# Altium PCB Bite_Force_System_PCB.PcbDoc
Units mm, origin at the board's own origin, x right, y up, seen from the top; angles counter-clockwise.
Board outline 67 x 53 mm, 4 copper layers (L1 [Signal], L2 [GND], L3 [GND], L4 [Signal]), stack 1.57 mm thick; 50 components, 29 nets, 301 pads, 46 vias.
Unrouted connection lines stored in the file: 20.
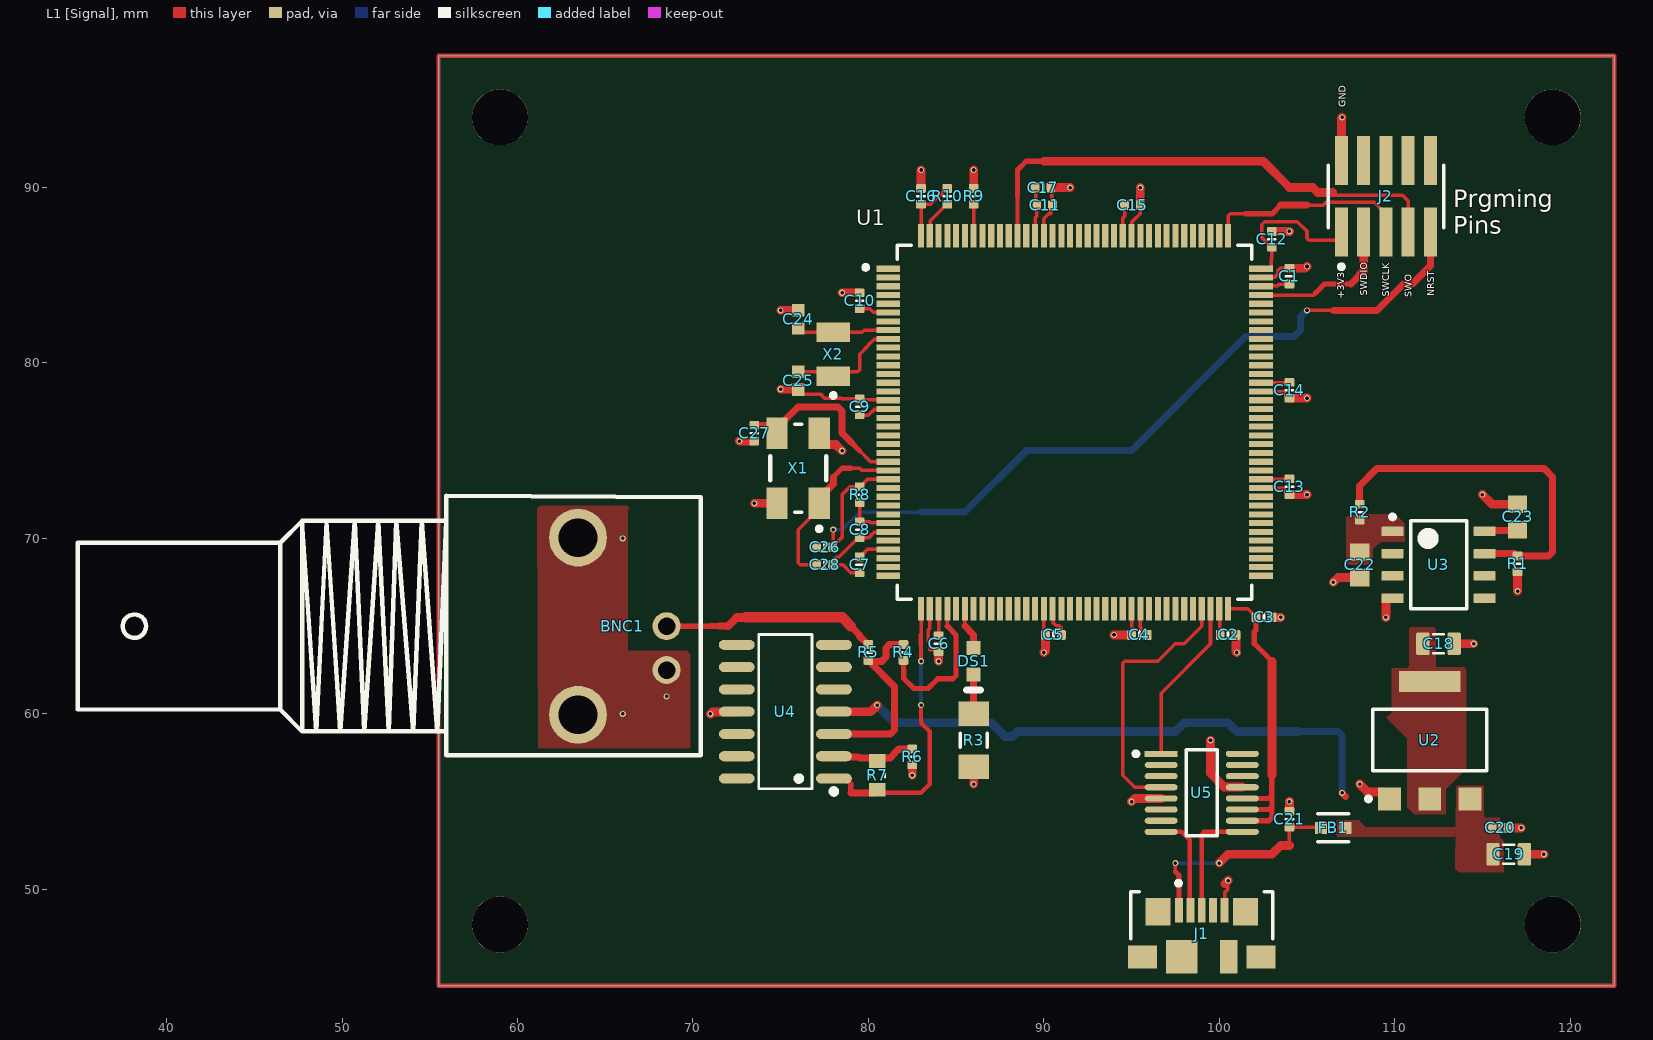
[diagram p0: L1 [Signal] view]
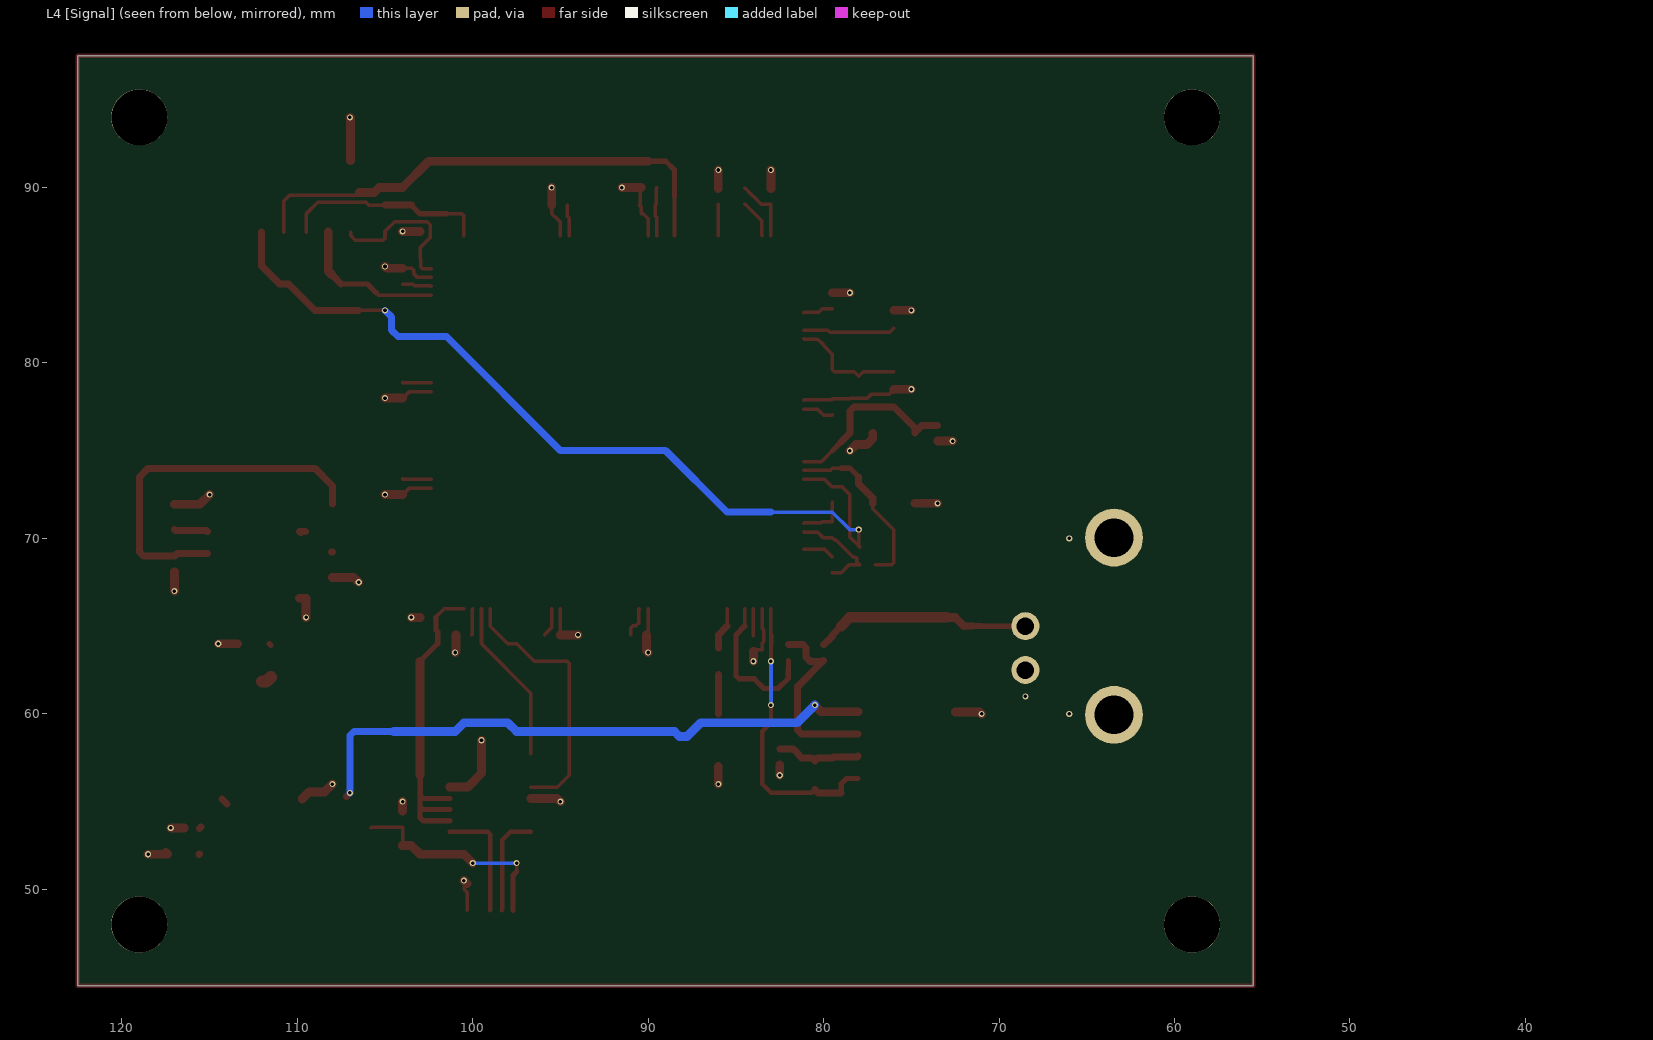
[diagram p1: L4 [Signal] view, seen from below]
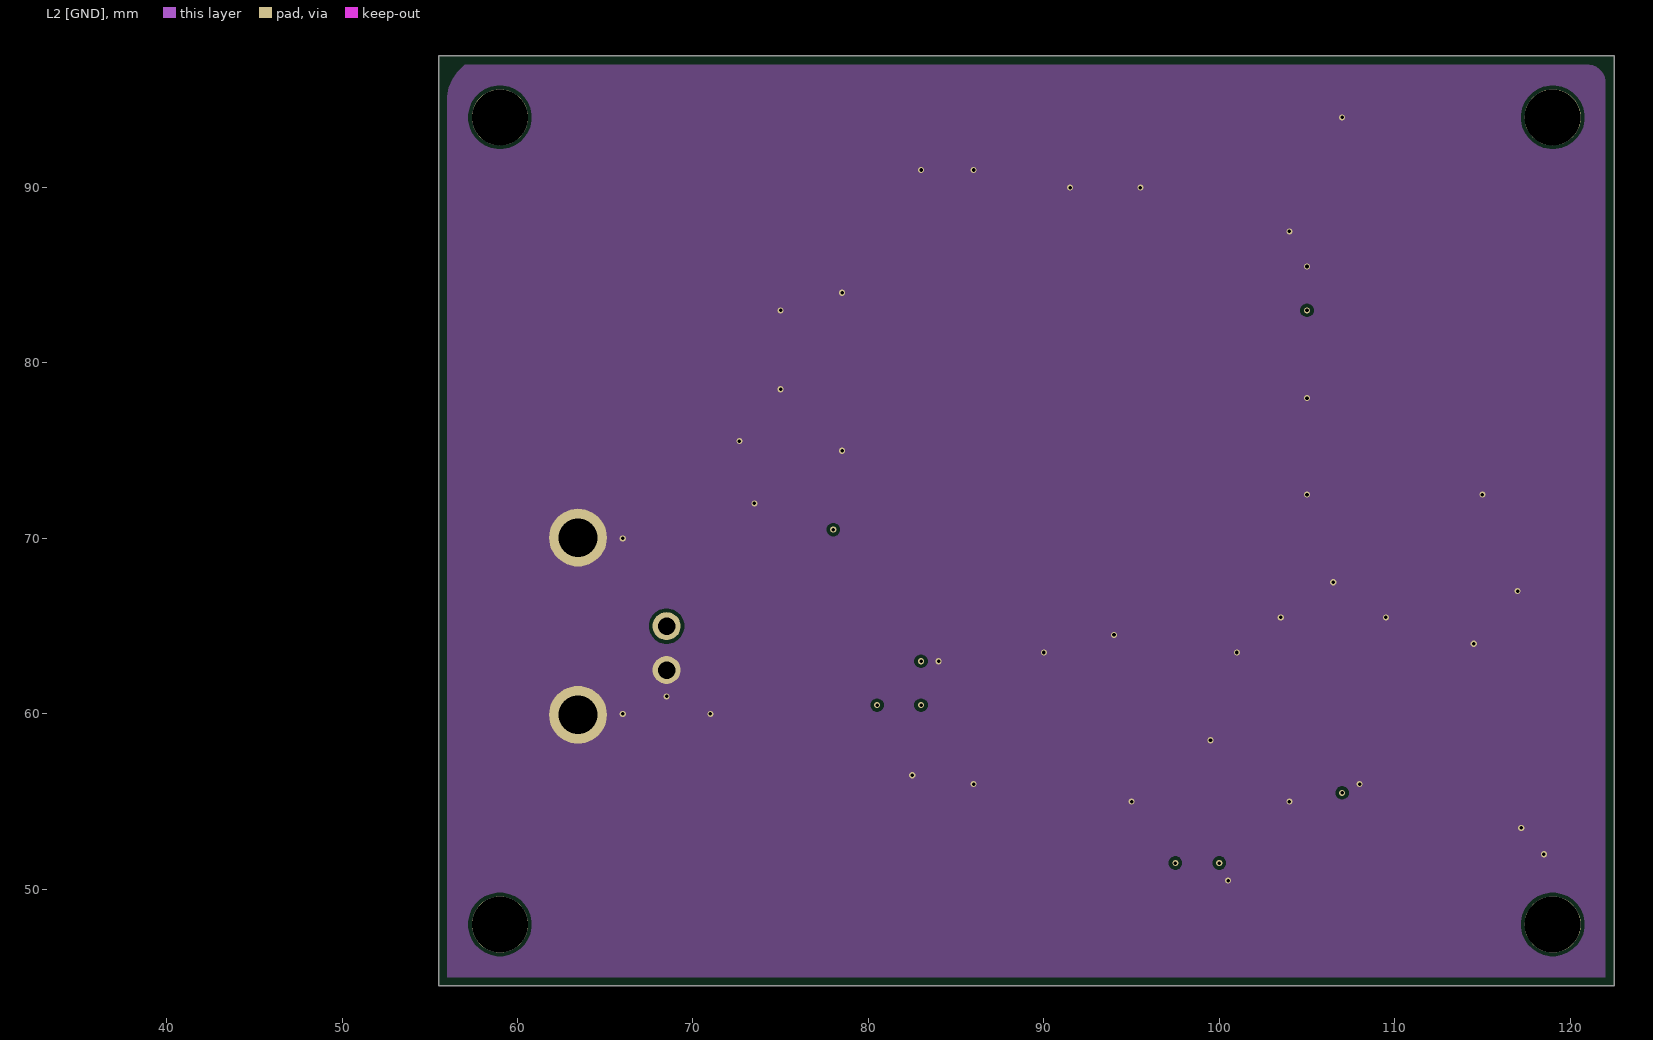
[diagram p2: L2 [GND]]
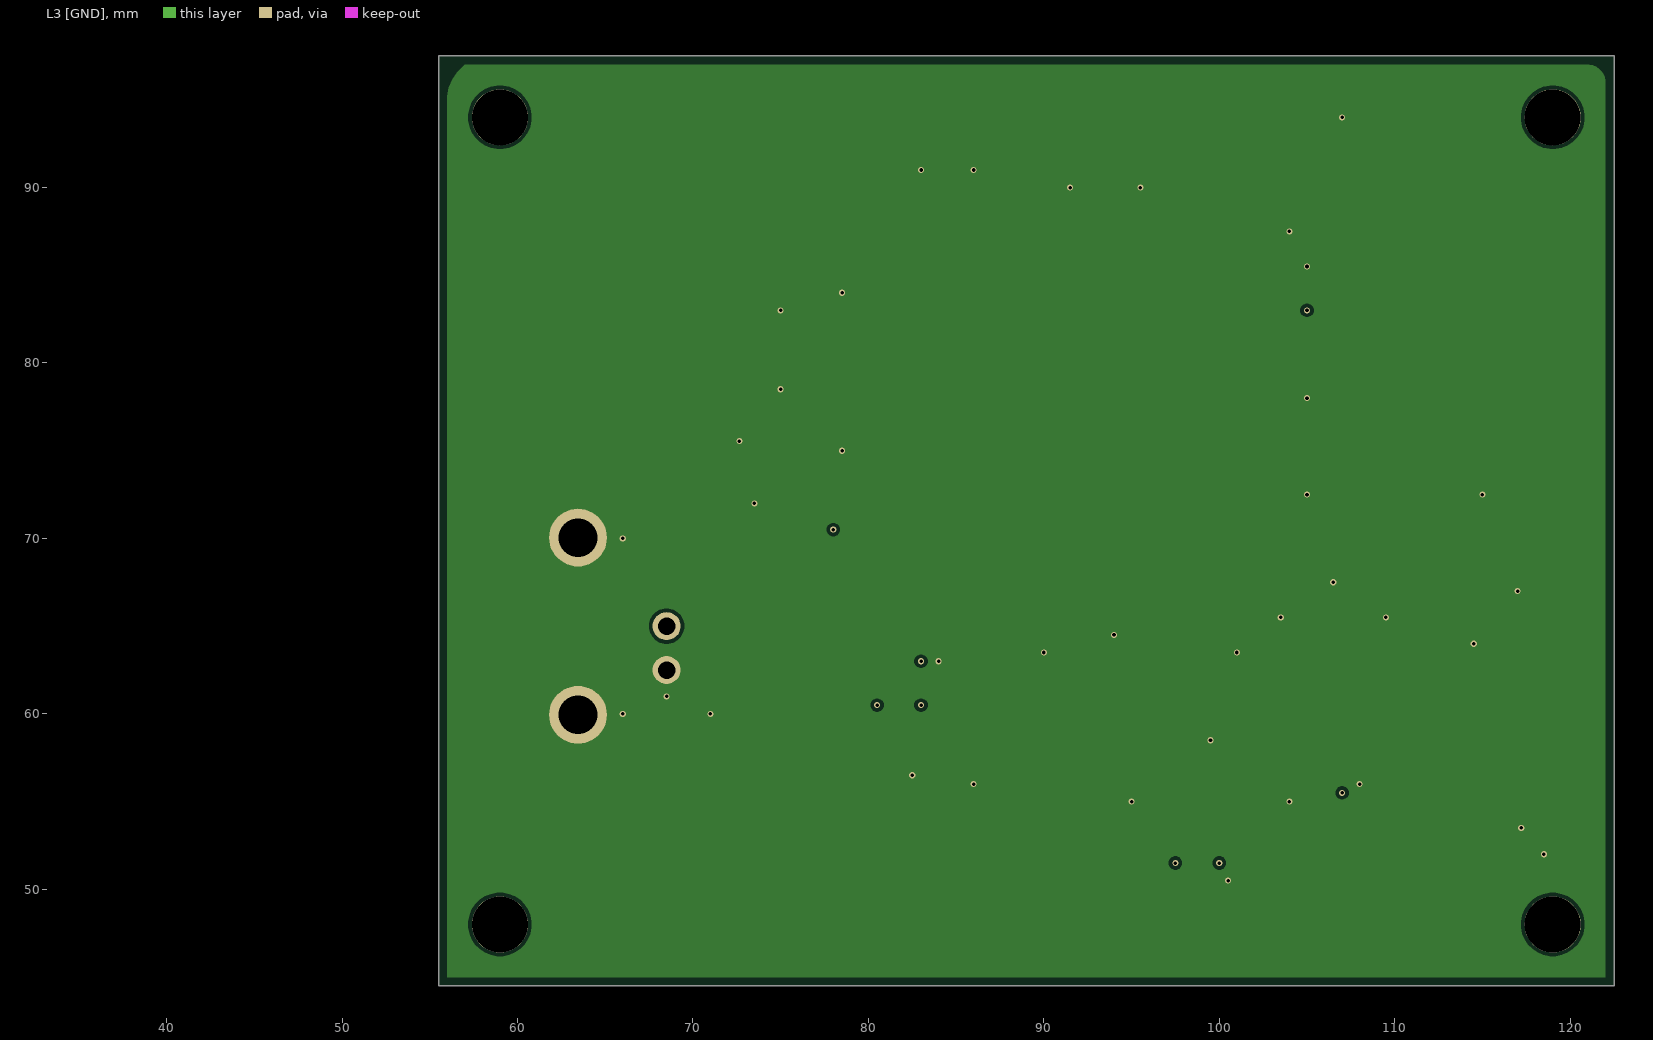
[diagram p3: L3 [GND]]
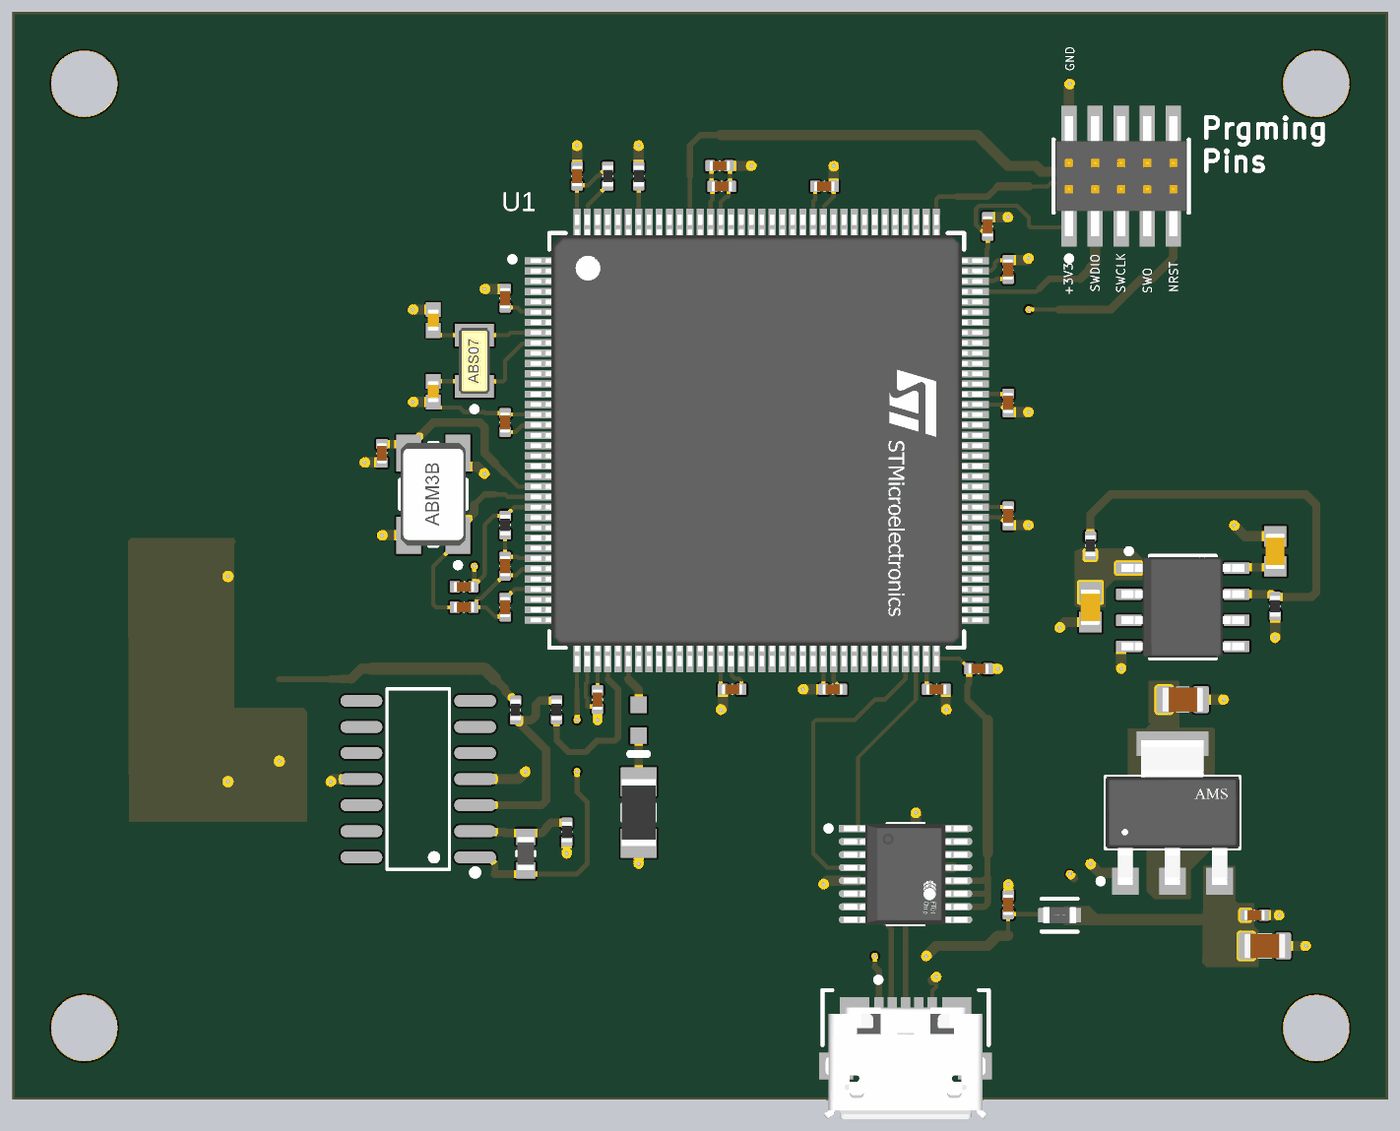
[diagram p4: 3D render of the assembled board from above, using the file's embedded part models]

## Layer stack, top to bottom
Top Solder: solder mask 0.0254, SM-001, Dk 4
L1 [Signal]: signal copper 0.035
Dielectric 1: prepreg 0.2, PP-017, Dk 4.6
L2 [GND]: signal copper 0.0175
Dielectric 3: core 1.065, Core-039, Dk 4.6
L3 [GND]: signal copper 0.0175
Dielectric 5: prepreg 0.2, PP-017, Dk 4.6
L4 [Signal]: signal copper 0.035
Bottom Solder: solder mask 0.0254, SM-001, Dk 4

## Board outline
55.5,48 55.5,97.5 122.5,97.5 122.5,44.5 55.5,44.5

## Design rules (kind name [scope] priority, off if disabled: settings)
Clearance [All] p1: gap=0.2 ignorepadtopadclearanceinfootprint=TRUE
DiffPairsRouting [All] p1: maxlimit=0.254 minlimit=0.203 mostfreqgap=0.254 toplayer_maxgap=0.203 toplayer_prefgap=0.203 toplayer_minwidth=0.26 toplayer_maxwidth=0.26 toplayer_prefwidth=0.26 bottomlayer_maxgap=0.203 bottomlayer_prefgap=0.203 bottomlayer_minwidth=0.26 bottomlayer_maxwidth=0.26 bottomlayer_prefwidth=0.26 impedanceprofiledriven=TRUE impedanceprofileid={92FACAE4-720D-47C8-9A18-A389506850A7} impedanceprofilevalue=90.000000 maxuncoupledlength=12.7
HoleSize [All] p1: absolutevalues=TRUE maxlimit=3.2 minlimit=0.025 maxpercent=80.000 minpercent=20.000
MinimumSolderMaskSliver [All] p1: minsoldermaskwidth=0.1
PolygonConnect [All] p1: connectstyle=Direct reliefconductorwidth=0.254 reliefentries=4 polygonreliefangle="90 Angle" airgapwidth=0.254
RoutingVias [All] p1: holewidth=0.2 width=0.35 viastyle="Through Hole" minholewidth=0.15 minwidth=0.3 maxholewidth=0.4 maxwidth=0.55
ShortCircuit [All] p1 off: allowed=FALSE
SilkToSolderMaskClearance [IsPad] p1: minsilkscreentomaskgap=0.1 clearancetoexposedcopper=TRUE
SolderMaskExpansion [All] p1: expansion=0.102 istentingtop=FALSE
SupplyNets "Schematic Supply Nets_4" [InNet('+5V')] p1: voltage=0.000
SupplyNets "Schematic Supply Nets_3" [InNet('+3V6')] p2: voltage=0.000
SupplyNets "Schematic Supply Nets_2" [InNet('GND')] p3: voltage=0.000
SupplyNets "Schematic Supply Nets_1" [InNet('MCU_VDD')] p4: voltage=0.000
SupplyNets "Schematic Supply Nets" [InNet('VBUS')] p5: voltage=0.000
UnRoutedNet [All] p1 off:
Width [All] p1: maxlimit=1 minlimit=0.2 preferedwidth=0.3 midlayer1_minwidth=0.254 midlayer1_maxwidth=0.254 midlayer1_prefwidth=0.254 midlayer2_minwidth=0.254 midlayer2_maxwidth=0.254 midlayer2_prefwidth=0.254 minimp=50.000000 maximp=50.000000 favimp=50.000000
24 further rules are at their usual default settings.

## Classes and differential pairs
differential pair class USB: USB_D
differential pair USB_D: +USB_D_P -USB_D_N

## Components (designator, comment, footprint, x,y, rotation, side; value= is the part's Value field where it differs from the comment)
BNC1 "KH-BNC75-3511" KH-BNC75-3511-Footprint-1 34.959,69.837 r270 top
C1 "Capacitor 2,2µF +/-20% 10V 0402" CAPC0402(1005)60_L 104,84.95 r90 top value=2.2µF
C2 "Capacitor 2,2µF +/-20% 10V 0402" CAPC0402(1005)60_L 100.5,64.5 r0 top value=2.2µF
C3 "Capacitor 100nF +/-20% 25V 0402" CAPC0402(1005)60_L 102.55,65.5 r0 top value=100nF
C4 "Capacitor 100nF +/-20% 25V 0402" CAPC0402(1005)60_L 95.45,64.5 r180 top value=100nF
C5 "Capacitor 100nF +/-20% 25V 0402" CAPC0402(1005)60_L 90.55,64.5 r180 top value=100nF
C6 "Capacitor 100nF +/-20% 25V 0402" CAPC0402(1005)60_L 84,64 r270 top value=100nF
C7 "Capacitor 100nF +/-20% 25V 0402" CAPC0402(1005)60_L 79.5,68.5 r270 top value=100nF
C8 "Capacitor 100nF +/-20% 25V 0402" CAPC0402(1005)60_L 79.5,70.5 r270 top value=100nF
C9 "Capacitor 100nF +/-20% 25V 0402" CAPC0402(1005)60_L 79.5,77.5 r90 top value=100nF
C10 "Capacitor 100nF +/-20% 25V 0402" CAPC0402(1005)60_L 79.5,83.55 r90 top value=100nF
C11 "Capacitor 100nF +/-20% 25V 0402" CAPC0402(1005)60_L 90.05,89 r0 top value=100nF
C12 "Capacitor 100nF +/-20% 25V 0402" CAPC0402(1005)60_L 103,87.05 r90 top value=100nF
C13 "Capacitor 100nF +/-20% 25V 0402" CAPC0402(1005)60_L 104,72.95 r270 top value=100nF
C14 "Capacitor 100nF +/-20% 25V 0402" CAPC0402(1005)60_L 104,78.45 r270 top value=100nF
C15 "Capacitor 100nF +/-20% 25V 0402" CAPC0402(1005)60_L 95.05,89 r0 top value=100nF
C16 "Capacitor 100nF +/-20% 25V 0402" CAPC0402(1005)60_L 83,89.5 r90 top value=100nF
C17 "Capacitor 2,2µF +/-20% 10V 0402" CAPC0402(1005)60_L 89.95,90 r0 top value=2.2µF
C18 "Capacitor 22µF +/-40% 16V 0805" CAPC0805(2012)145_L 112.5,64 r0 top value=22µF
C19 "Capacitor 22µF +/-40% 16V 0805" CAPC0805(2012)145_L 116.5,52 r0 top value=22µF
C20 "Capacitor 2,2µF +/-20% 10V 0402" CAPC0402(1005)60_L 116,53.5 r0 top value=2.2µF
C21 "Capacitor 2,2µF +/-20% 10V 0402" CAPC0402(1005)60_L 104,54 r90 top value=2.2µF
C22 "Capacitor 1uF +/- 10% 16V 0603" CAPC1608X90X35ML15T15 108,68.5 r270 top value=1µF
C23 "Capacitor 1uF +/- 10% 16V 0603" CAPC1608X90X35ML15T15 117,71.225 r90 top value=1µF
C24 "Capacitor 10 pF +/- 5% 50 V 0402" CAPC1005X55X25ML05T05 76,82.49 r90 top value=10pF
C25 "Capacitor 10 pF +/- 5% 50 V 0402" CAPC1005X55X25ML05T05 76,79 r270 top value=10pF
C26 "Capacitor 100nF +/-20% 25V 0402" CAPC0402(1005)60_L 77.5,69.5 r180 top value=100nF
C27 "Capacitor 22pF +/-10% 50V 0402" CAPC0402(1005)60_L 73.5,76 r90 top value=22pF
C28 "Capacitor 22pF +/-10% 50V 0402" CAPC0402(1005)60_L 77.5,68.5 r180 top value=22pF
DS1 "LTST-C190TBKT" LTST-C190TBKT-2_V 86,63 r270 top
FB1 "MH1608-121Y" FP-MH1608-MFG 106.5,53.5 r0 top
J1 "47346-0001" FP-473460001-MFG 99,46.5 r0 top
J2 "FTS-105-01-L-DV" FP-FTS-105-01-L-DV-MFG 109.5,89.5 r0 top
R1 "Resistor 10K  +/-1 % 0402 63 mW" RESC0402(1005)_L 117,68.55 r270 top value=10k
R2 "Resistor 4K02 +/-1 % 0402 63 mW" RESC0402(1005)_L 108,71.5 r270 top value=4.02k
R3 "Resistor 1k +/-1% 1206 250 mW" RESC3116X70X50ML13T20 86,58.5 r90 top value=1k
R4 "Resistor 10K  +/-1 % 0402 63 mW" RESC0402(1005)_L 82,63.5 r90 top value=10k
R5 "Resistor 10K  +/-1 % 0402 63 mW" RESC0402(1005)_L 80,63.5 r270 top value=10k
R6 "Resistor 10K  +/-1 % 0402 63 mW" RESC0402(1005)_L 82.5,57.55 r90 top value=10k
R7 "RT0603BRE078KL" RT0603BRE078KL-Footprint-1 80.5,56.5 r270 top value=8k
R8 "Resistor 10K  +/-1 % 0402 63 mW" RESC0402(1005)_L 79.5,72.5 r90 top value=10k
R9 "Resistor 10K  +/-1 % 0402 63 mW" RESC0402(1005)_L 86,89.5 r90 top value=10k
R10 "Resistor 10K  +/-1 % 0402 63 mW" RESC0402(1005)_L 84.5,89.5 r270 top value=10k
U1 "STM32H723ZGT6" FP-LQFP144-1A-MFG 91.75,76.625 r0 top locked
U2 "AMS1117-3.3" FP-AMS1117-IPC_B 112,58.5 r90 top
U3 "LP2951DR" D0008A_L 112.5,68.5 r0 top
U4 "TLC27L4CDR" TLC27L4CDR-Footprint-1 75.5,60 r90 top
U5 "FT230XS-R" FP-SSOP-16-IPC_C 99,55.5 r0 top
X1 "ABM3B-8.000MHZ-B2-T" ABRA-ABM3B_V 76,74 r90 top
X2 "ABS07-32.768KHz-T" ABRA-ABS07-2_V 78,80.5 r90 top

## Footprints (in the part's own frame and the unit in brackets; to place one, negate y for a bottom-side part, rotate by r counter-clockwise, add the part's x,y. Pads: shape width x height; smd on the part's side, far side on the other; paste and mask are expansions set on the pad)
ABRA-ABM3B_V [mm] "SMD, 4-Leads, Body 5x3.2mm"
  rect 1.8x1.2 smd: 1(-2,-1.2) 2(2,-1.2) 3(2,1.2) 4(-2,1.2)
  silkscreen extent -3.57,-1.6 2.5,1.6, body extent -2.5,-1.59 2.5,1.59, height 1.13
ABRA-ABS07-2_V [mm] "SMD, 2-Leads, Body 3.2x1.5mm"
  rect 1.1x1.9 smd: 1(-1.25,0) 2(1.25,0)
  silkscreen extent -2.47,-0.13 -2.23,0.12, body extent -1.6,-0.75 1.6,0.75, height 0.9
CAPC0402(1005)60_L [mm] "Chip Capacitor, Body 1.0x0.5mm, Height 0.6mm, IPC High Density"
  rrect25% 0.5x0.55 smd: 1(-0.45,0) 2(0.45,0)
  silkscreen extent 0,-0.2 0,0.2, body extent -0.5,-0.25 0.5,0.25, height 0.6
CAPC0805(2012)145_L [mm] "Chip Capacitor, Body 2.0x1.2mm, Height 1.45mm, IPC High Density"
  rrect25% 0.76x1.3 smd: 1(-0.9,0) 2(0.89,0)
  silkscreen extent -0.3,-0.55 0.3,0.55, body extent -1,-0.6 1,0.6, height 1.45
CAPC1005X55X25ML05T05 [mm] "Chip Capacitor, 2-Leads, Body 1.05x0.55mm, IPC Low Density"
  rect 0.72x0.72 smd mask+0.075: 1(-0.51,0) 2(0.51,0)
  body extent -0.53,-0.28 0.53,0.28, height 0.55
CAPC1608X90X35ML15T15 [mm] "Chip Capacitor, 2-Leads, Body 1.75x0.95mm, IPC Low Density"
  rect 1x1.1 smd: 1(-0.725,0) 2(0.725,0)
  body extent -0.87,-0.48 0.87,0.48, height 0.9
D0008A_L [mm] "SOIC, 8-Leads, Body 5x4mm, Pitch 1.27mm, IPC High Density"
  rrect18% 1.25x0.55 smd: 1(-2.625,1.905) 2(-2.625,0.635) 3(-2.625,-0.635) 4(-2.625,-1.905) 5(2.625,-1.905) 6(2.625,-0.635) 7(2.625,0.635) 8(2.625,1.905)
  silkscreen extent -2.75,-2.5 1.6,2.85, body extent -3,-2.45 3,2.45, height 1.63
FP-473460001-MFG [mm]
  rect 0.45x1.38 smd paste+0 mask+0: 1(-1.3,2.31) 2(-0.65,2.31) 3(0,2.31) 4(0.65,2.31) 5(1.3,2.31)
  rect 1.425x1.55 smd paste+0 mask+0: 6(-2.488,2.225) 7(2.488,2.225)
  rect 1.65x1.3 smd paste+0 mask+0: 8(-3.375,-0.35) 11(3.375,-0.35)
  rect 1.8x1.9 smd paste+0 mask+0: 9(-1.15,-0.35)
  rect 1x1.9 smd paste+0 mask+0: 10(1.55,-0.35)
  silkscreen extent -4.05,0.67 4.05,3.97, body extent -4.3,-2.48 4.3,3.45, height 0.25
FP-AMS1117-IPC_B [mm]
  rect 1.3x1.3 smd paste+0 mask+0: 1(-3.345,2.29) 2(-3.345,0) 3(-3.345,-2.29)
  rect 1.2x3.5 smd paste+0 mask+0: 4(3.345,0)
  silkscreen extent -3.47,-3.25 1.75,3.62, body extent -4.25,-3.5 4.25,3.5, height 0.25
FP-FTS-105-01-L-DV-MFG [mm]
  rect 0.74x2.79 smd paste+0 mask+0: 1(-2.54,-2.035) 2(-2.54,2.035) 3(-1.27,-2.035) 4(-1.27,2.035) 5(0,-2.035) 6(0,2.035) 7(1.27,-2.035) 8(1.27,2.035) 9(2.54,-2.035) 10(2.54,2.035)
  silkscreen extent -3.3,-4.14 3.3,1.78, body extent -3.4,-3.53 3.4,3.53, height 0.25
FP-LQFP144-1A-MFG [mm]
  rect 1.35x0.35 smd paste+0 mask+0: 1(-10.625,8.75) 2(-10.625,8.25) 3(-10.625,7.75) 4(-10.625,7.25) 5(-10.625,6.75) 6(-10.625,6.25) 7(-10.625,5.75) 8(-10.625,5.25) 9(-10.625,4.75) 10(-10.625,4.25) 11(-10.625,3.75) 12(-10.625,3.25) 13(-10.625,2.75) 14(-10.625,2.25) 15(-10.625,1.75) 16(-10.625,1.25) 17(-10.625,0.75) 18(-10.625,0.25) 19(-10.625,-0.25) 20(-10.625,-0.75) 21(-10.625,-1.25) 22(-10.625,-1.75) 23(-10.625,-2.25) 24(-10.625,-2.75) 25(-10.625,-3.25) 26(-10.625,-3.75) 27(-10.625,-4.25) 28(-10.625,-4.75) 29(-10.625,-5.25) 30(-10.625,-5.75) 31(-10.625,-6.25) 32(-10.625,-6.75) 33(-10.625,-7.25) 34(-10.625,-7.75) 35(-10.625,-8.25) 36(-10.625,-8.75) 73(10.625,-8.75) 74(10.625,-8.25) 75(10.625,-7.75) 76(10.625,-7.25) 77(10.625,-6.75) 78(10.625,-6.25) 79(10.625,-5.75) 80(10.625,-5.25) 81(10.625,-4.75) 82(10.625,-4.25) 83(10.625,-3.75) 84(10.625,-3.25) 85(10.625,-2.75) 86(10.625,-2.25) 87(10.625,-1.75) 88(10.625,-1.25) 89(10.625,-0.75) 90(10.625,-0.25) 91(10.625,0.25) 92(10.625,0.75) 93(10.625,1.25) 94(10.625,1.75) 95(10.625,2.25) 96(10.625,2.75) 97(10.625,3.25) 98(10.625,3.75) 99(10.625,4.25) 100(10.625,4.75) 101(10.625,5.25) 102(10.625,5.75) 103(10.625,6.25) 104(10.625,6.75) 105(10.625,7.25) 106(10.625,7.75) 107(10.625,8.25) 108(10.625,8.75)
  rect 0.35x1.35 smd paste+0 mask+0: 37(-8.75,-10.625) 38(-8.25,-10.625) 39(-7.75,-10.625) 40(-7.25,-10.625) 41(-6.75,-10.625) 42(-6.25,-10.625) 43(-5.75,-10.625) 44(-5.25,-10.625) 45(-4.75,-10.625) 46(-4.25,-10.625) 47(-3.75,-10.625) 48(-3.25,-10.625) 49(-2.75,-10.625) 50(-2.25,-10.625) 51(-1.75,-10.625) 52(-1.25,-10.625) 53(-0.75,-10.625) 54(-0.25,-10.625) 55(0.25,-10.625) 56(0.75,-10.625) 57(1.25,-10.625) 58(1.75,-10.625) 59(2.25,-10.625) 60(2.75,-10.625) 61(3.25,-10.625) 62(3.75,-10.625) 63(4.25,-10.625) 64(4.75,-10.625) 65(5.25,-10.625) 66(5.75,-10.625) 67(6.25,-10.625) 68(6.75,-10.625) 69(7.25,-10.625) 70(7.75,-10.625) 71(8.25,-10.625) 72(8.75,-10.625) 109(8.75,10.625) 110(8.25,10.625) 111(7.75,10.625) 112(7.25,10.625) 113(6.75,10.625) 114(6.25,10.625) 115(5.75,10.625) 116(5.25,10.625) 117(4.75,10.625) 118(4.25,10.625) 119(3.75,10.625) 120(3.25,10.625) 121(2.75,10.625) 122(2.25,10.625) 123(1.75,10.625) 124(1.25,10.625) 125(0.75,10.625) 126(0.25,10.625) 127(-0.25,10.625) 128(-0.75,10.625) 129(-1.25,10.625) 130(-1.75,10.625) 131(-2.25,10.625) 132(-2.75,10.625) 133(-3.25,10.625) 134(-3.75,10.625) 135(-4.25,10.625) 136(-4.75,10.625) 137(-5.25,10.625) 138(-5.75,10.625) 139(-6.25,10.625) 140(-6.75,10.625) 141(-7.25,10.625) 142(-7.75,10.625) 143(-8.25,10.625) 144(-8.75,10.625)
  silkscreen extent -12.02,-10.1 10.1,10.1, body extent -11.4,-11.4 11.4,11.4, height 0.25
FP-MH1608-MFG [mm]
  rect 0.7x0.7 smd paste+0 mask+0: 1(-0.7,0) 2(0.7,0)
  silkscreen extent -0.87,-0.8 0.87,0.8, body extent -1.15,-0.6 1.15,0.6, height 0.25
FP-SSOP-16-IPC_C [mil]
  rect 73.91x13.66 smd paste+0 mask+0: 1(-91.07,87.5)
  rrect100% 73.91x13.66 smd paste+0 mask+0: 2(-91.07,62.5) 3(-91.07,37.5) 4(-91.07,12.5) 5(-91.07,-12.5) 6(-91.07,-37.5) 7(-91.07,-62.5) 8(-91.07,-87.5) 9(91.07,-87.5) 10(91.07,-62.5) 11(91.07,-37.5) 12(91.07,-12.5) 13(91.07,12.5) 14(91.07,37.5) 15(91.07,62.5) 16(91.07,87.5)
  silkscreen extent -153,-96 34,96, body extent -132,-100 132,100, height 10
KH-BNC75-3511-Footprint-1 [mm]
  round 1.6 hole 1 paste-2539.97 mask+0.05: 1(4.837,33.541) 2(7.337,33.541)
  round 3.3 hole 2.2 paste-2539.97 mask+0.05: 3(9.887,28.491) 4(-0.213,28.491)
  silkscreen extent -2.61,-0.01 12.19,35.49
LTST-C190TBKT-2_V [mm] "SMD, 2-Leads, Body 1.6x0.8mm"
  rect 0.8x0.8 smd: 1(-0.75,0) 2(0.75,0)
  silkscreen extent 1.65,-0.4 1.65,0.4, body extent -0.8,-0.4 0.8,0.4, height 0.8
RESC0402(1005)_L [mm] "Chip Resistor, Body 1.0x0.5mm, IPC High Density"
  rrect25% 0.5x0.55 smd: 1(-0.45,0) 2(0.45,0)
  silkscreen extent 0,-0.2 0,0.2, body extent -0.5,-0.25 0.5,0.25, height 0.3
RESC3116X70X50ML13T20 [mm] "Chip Resistor, 2-Leads, Body 3.25x1.65mm, IPC Low Density"
  rect 1.4x1.75 smd: 1(-1.5,0) 2(1.5,0)
  silkscreen extent -0.4,-0.77 0.4,0.77, body extent -1.63,-0.82 1.63,0.82, height 0.7
RT0603BRE078KL-Footprint-1 [mm]
  rect 0.79x0.93 smd: 1(-0.82,0) 2(0.82,0)
  silkscreen extent -0.11,-0.45 0.11,0.45, body extent -0.8,-0.4 0.8,0.4, height 0.55
TLC27L4CDR-Footprint-1 [mm]
  oval 0.574x2.038 smd: 1(-3.682,-2.537) 2(-2.412,-2.537) 3(-1.142,-2.537) 4(0.128,-2.537) 5(1.398,-2.537) 6(2.668,-2.537) 7(3.938,-2.537) 8(3.938,3.001) 9(2.668,3.001) 10(1.398,3.001) 11(0.128,3.001) 12(-1.142,3.001) 13(-2.412,3.001) 14(-3.682,3.001)
  silkscreen extent -4.57,-2.69 4.53,1.75

## Part data
BNC1: library part CMP-002-00074-2, "1 Inner Hole BNC Board-End Elbow 3GHz -55℃~+155℃ 75Ω 9.5mm Plugin Coaxial Connectors (RF) ROHS"
C1 C2 C17 C20 C21: library part CMP-001-00056-4, "Chip Capacitor, 2,2µF +/-20%, 10V, 0402, Thickness 0.6 mm", Case/Package=0402, Max Operating Temperature=85°C, Min Operating Temperature=-55°C, Tolerance=10%, Voltage Rating=10V, Mounting Technology=SMT, Pins=2
C3 C4 C5 C6 C7 C8 C9 C10 C11 C12 C13 C14 C15 C16 C26: library part CMP-001-00065-4, "Chip Capacitor, 100nF +/-20%, 25V, 0402, Thickness 0.6 mm", Case/Package=0402, Max Operating Temperature=85°C, Min Operating Temperature=-55°C, Tolerance=10%, Voltage Rating=25V, Mounting Technology=SMT, Pins=2
C18 C19: library part CMP-001-00081-4, "Chip Capacitor, 22µF +/-40%, 16V, 0805, Thickness 1.45 mm", Case/Package=0805, Max Operating Temperature=85°C, Min Operating Temperature=-55°C, Tolerance=5%, Voltage Rating=16V, Mounting Technology=SMT, Pins=2
C22 C23: library part CMP-001-00004-6, "Chip Capacitor, 1 uF, +/- 10%, 16 V, 0603 (1608 Metric)", Capacitor Type=Ceramic, Case/Package=0603, Max Operating Temperature=125°C, Min Operating Temperature=-55°C, Tolerance=10%, Voltage Rating=16V, Mounting Technology=SM, Pins=2, RoHS Compliant=True
C24 C25: library part CMP-001-00013-6, "Chip Capacitor, 10 pF, +/- 5%, 50 V, 0402 (1005 Metric)", Capacitor Type=Ceramic, Case/Package=0402, Max Operating Temperature=125°C, Min Operating Temperature=-55°C, Tolerance=5%, Voltage Rating=50V, Mounting Technology=SM, Pins=2, RoHS Compliant=True
C27 C28: library part CMP-001-00073-3, "Chip Capacitor, 22pF +/-10%, 50V, 0402, Thickness 0.6 mm", Case/Package=0402, Max Operating Temperature=85°C, Min Operating Temperature=-55°C, Tolerance=10%, Voltage Rating=50V, Mounting Technology=SMT, Pins=2
DS1: library part CMP-007-00026-2, "LED Uni-Color Blue, 76 mW, 20 mA, -20 to 80 degC, 2-Pin SMD, RoHS, Tape and Reel", Case/Package=0603, Colour=Blue, Forward Current=20mA, Forward Voltage=2.8V, Manufacturer=Lite-On, Max Operating Temperature=80°C, Min Operating Temperature=-20°C, Package Description="2-Pin Surface Mount Device, Body 1.6 x 0.8 mm", Package Quantity=3000, Package Reference=C190TBKT-2, Datasheet URL=http://optoelectronics.liteon.com/upload/download/DS-22-99-0224/S_110_LTST-C190TBKT(0630).pdf, Datasheet Version="Rev. K, 08/2011", Illumination Colour=Blue, Lens Style=Diffused, Luminous Intensity=28mcd, Manufacturer URL=http://www.us.liteon.com/, Mounting Technology=SM, Nominal Vf=3.3V, Packaging=TapeandReel, Pins=2, RoHS Compliant=True, Viewing Angle=130degrees
FB1: library part CMP-00030-00001-1, "Ferrite Chip, 1 Function(s), 2A, 2 Pin(s)", Max Operating Temperature=125°C, Min Operating Temperature=-55°C, Mounting Technology="Surface Mount", RoHS Compliant=Yes
J1: library part CMP-002-00072-1, "USB Connector, 5 Contact(s), Female, Right Angle, Surface Mount Terminal, Locking, Receptacle", Connector Type="TELECOM AND DATACOM CONNECTOR", Mounting Technology=Cable, RoHS Compliant=Yes
J2: library part CMP-002-00076-1, "Board Connector, 10 Contact(s), 2 Row(s), Male, Straight, 0.05 inch Pitch, Surface Mount Terminal, Locking, Black Insulator", Max Operating Temperature=125°C, Min Operating Temperature=-55°C, Connector Type="BOARD CONNECTOR", Mounting Technology=Board, RoHS Compliant=Yes
R1 R4 R5 R6 R8 R9 R10: library part CMP-009-00149-3, "Chip Resistor, 10 kOhms, +/-1 %, 63 mW, -55 to 125 degC, 0402", Case/Package=0402, Max Operating Temperature=155°C, Min Operating Temperature=-55°C, Power=63mW, Tolerance=1%, Pins=2
R2: library part CMP-009-00153-3, "Chip Resistor, 4,02 kOhms, +/-1 %, 63 mW, -55 to 155 degC, 0402", Case/Package=0402, Max Operating Temperature=155°C, Min Operating Temperature=-55°C, Power=63mW, Tolerance=1%, Pins=2
R3: library part CMP-009-00011-5, "Chip Resistor, 1 KOhm, +/- 1%, 0.25 W, -55 to 155 degC, 1206 (3216 Metric)", Case/Package=1206, Max Operating Temperature=155°C, Min Operating Temperature=-55°C, Power=250mW, Tolerance=1%, Voltage Rating=200V, Mounting Technology=SM, Pins=2, RoHS Compliant=True
R7: library part CMP-009-00182-2, "Fixed Resistor", Case/Package=0603, Max Operating Temperature=155°C, Min Operating Temperature=-55°C, Power=100mW, Tolerance=0.1%, Mounting Technology="Surface Mount", Pins=2, RoHS Compliant=Yes
U1: library part CMP-020-00024-1, "RISC Microcontroller, 32-Bit, FLASH, CORTEX-M7 CPU, 550MHz, CMOS, PQFP144"
U2: library part CMP-019-00049-1, "Fixed Positive LDO Regulator, 3.3V, 1.3V Dropout, PDSO3", Case/Package=SOP, Pins=3, RoHS Compliant=Yes
U3: library part CMP-019-00050-1, "Adjustable Positive LDO Regulator, 1.235V Min, 30V Max, 0.6V Dropout, BIPolar, PDSO8", Case/Package=SOP, Pins=8, RoHS Compliant=Yes
U4: library part CMP-014-00003-3, "Operational Amplifier, 4 Func, 12000uV Offset-Max, CMOS, PDSO14", Case/Package=SOP, Max Operating Temperature=70°C, Min Operating Temperature=0°C, Nominal Supply Voltage=10V, Channels=4, Pins=14, RoHS Compliant=Yes
U5: library part CMP-015-00008-1, "Microprocessor Circuit, CMOS, PDSO16", Case/Package=SSOP, Max Operating Temperature=85°C, Max Supply Voltage=5.5V, Min Operating Temperature=-40°C, Min Supply Voltage=2.97V, Nominal Supply Voltage=5V, Pins=16, RoHS Compliant=Yes
X1: library part CMP-003-00021-2, "Ceramic SMD Crystal, 8 MHz, +/- 20 ppm, 18 pF, -20 to 70 degC, 4-Pin SMD, RoHS, Tape and Reel", Case/Package=CSMD, Frequency=8MHz, Frequency Tolerance=20ppm, Load Capacitance=18pF, Manufacturer=Abracon, Max Operating Temperature=70°C, Min Operating Temperature=-20°C, Package Description="4-Pin Surface Mount Device, Body 5 x 3.2 mm", Package Quantity=1000, Package Reference=ABM3B, Resistance=200Ohm, Datasheet URL=http://www.abracon.com/Resonators/abm3b.pdf, Datasheet Version=Aug-15, ESR=200, Manufacturer URL=http://www.abracon.com/, Mounting Technology=SM, Packaging=TapeandReel, Pins=4, RoHS Compliant=True, Tolerance=20ppm
X2: library part CMP-003-00022-2, "Low Profile Crystal, 32.768 kHz, +/- 20 ppm, 12.5 pF, -40 to 85 degC, 2-Pin SMD, Pb-Free, Tape and Reel", Case/Package=CSMD, Frequency=32.768kHz, Frequency Tolerance=20ppm, Load Capacitance=12.5pF, Manufacturer=Abracon, Max Operating Temperature=85°C, Min Operating Temperature=-40°C, Package Description="2-Pin Surface Mount Device, Body 3.2 x 1.5 mm", Package Quantity=3000, Package Reference=ABS07-2, Datasheet URL=http://www.abracon.com/Resonators/ABS07.pdf, Datasheet Version=Aug-15, ESR=70k, Manufacturer URL=http://www.abracon.com/, Mounting Technology=SM, Package URL=http://www.abracon.com/Support/PackageDrawing/Resonators/ABS07.PDF, Packaging=TapeandReel, Pins=2, RoHS Compliant=True, Tolerance=20ppm

## Free pads (board coordinates)
  round 3.2 hole 3.2: MH1(59,94) MH1(119,48) MH2(59,48) MH3(119,94)

## Via types
v1: diameter 0.35, hole 0.2, L1 [Signal] to L4 [Signal], 46 vias

## Nets (pads, with @x,y where several pads share a name; then routed paths per layer and width w, separated by ;. In a path a pad name is that pad's centre, name@x,y a point inside that pad or via, vN(x,y) a via of type N, cw(c..) or ccw(c..) an arc to the next point about the centre after c; other vN are vias at no path point)
+3V6: C22.1 R2.2 U1.32 U3.1 | length 0.5
  L1 [Signal] w0.4: C22.1 C22.1@108.05,69.225 ; U3.1@109.525,70.405 U3.1 U3.1@109.8,70.33
+5V: C19.1 C20.1 C23.1 FB1.2 U2.3 U3.8 U4.4 | length 36.5
  L1 [Signal] w0.4: v1(107,55.5) 107.2,55.3 ; U2.3@114,54.865 U2.3 ; U3.8 115.172,70.453 116.953,70.453 C23.1 ; C20.1@115.5,53.55 C20.1 C20.1@115.575,53.475 ; C19.1@115.575,52.025 C19.1
  L1 [Signal] w0.5: U4.4 80.128,60.128 v1(80.5,60.5)
  L4 [Signal] w0.4: 104.5,59 106.766,59 107,58.766 v1(107,55.5)
  L4 [Signal] w0.5: v1(80.5,60.5) 81.5,59.5 87,59.5 87.793,58.707 88.207,58.707 88.5,59 97.5,59 98,59.5 100.5,59.5 101,59 104.5,59
ADC_IN: R7.2 U1.37 U4.1 | length 16.7
  L1 [Signal] w0.2: 82.998,64.5 83,64.502 U1.37
  L1 [Signal] w0.254: R7.2 80.68,55.5 83,55.5 83.5,56 83.5,59 83,59.5 v1(83,60.5) ; 82.998,64.5 82.998,63.935 83,63.933 v1(83,63)
  L1 [Signal] w0.3: U4.1 78.695,56.318 79,56.012 79,55.5
  L1 [Signal] w0.4: 79,55.5 80.32,55.5 R7.2
  L4 [Signal] w0.254: v1(83,60.5) v1(83,63)
BNC_IN: BNC1.1 R5.1 | length 12.4
  L1 [Signal] w0.3: BNC1.1 71,65
  L1 [Signal] w0.35: 71,65 71.5,65
  L1 [Signal] w0.4: 71.5,65 72,65 ; 79,65 79.5,64.5 79.5,64.425 79.975,63.95 R5.1
  L1 [Signal] w0.45: 72,65 72.5,65.5
  L1 [Signal] w0.5: 72.5,65.5 73,65.5
  L1 [Signal] w0.6: 73,65.5 78.5,65.5 79,65
BOOT0: R9.1 U1.138 | length 1.8
  L1 [Signal] w0.2: U1.138 R9.1
DAC_OUT: R4.1 U1.40 | length 8.6
  L1 [Signal] w0.2: 84.5,65 U1.40
  L1 [Signal] w0.3: R4.1 82,62.5 82.015,62.485 82.015,62.024 82.592,61.447 83.408,61.447 83.961,62 84.824,62 85,62.176 85,64.5 84.5,65
GND: BNC1.2 BNC1.3 BNC1.4 C1.2 C2.2 C3.2 C4.2 C5.2 C6.2 C7.2 C8.2 C9.2 C10.2 C11.2 C12.2 C13.2 C14.2 C15.2 C16.2 C17.2 C18.2 C19.2 C20.2 C21.2 C22.2 C23.2 C24.2 C25.2 C26.2 C27.1 C28.1 J1.5 J2.2 R1.2 R3.1 R6.1 R9.2 U1.16 U1.31 U1.38 U1.51 U1.61 U1.83 U1.94 U1.107 U1.120 U1.130 U2.1 U3.4 U4.11 U5.5 U5.13 X1.2 X1.4 | length 72.8
  L1 [Signal] w0.2: C25.2 76.26,78.23 77.27,78.23 77.5,78 78.473,78 78.523,77.95 C9.2 79.55,77.9 81.1,77.9 U1.16 ; C7.2 79.003,68.05 78.553,68.5 C28.1 78.1,68.65 78.1,68.866 78.159,68.925 78.308,68.925 79.283,69.9 79.35,69.9 C8.2 80.033,70.05 80.15,70.167 80.15,70.174 80.326,70.35 81.1,70.35 U1.31 ; U1.38 83.5,64.863 83.425,64.788 83.425,64.112 83.5,64.037 83.5,63.667 83.883,63.667 C6.2 ; U1.51 90,64.6 C5.2 ; U1.130 90,88.225 90.275,88.5 90.383,88.5 90.383,88.883 C11.2 90.45,89.05 90.45,89.95 C17.2 ; C4.2 U1.61 ; U1.120 95.025,87.275 95.025,88.049 95.25,88.275 95.275,88.275 95.5,88.5 C15.2 ; J1.5 100.3,49.8 100.492,49.992 100.492,50.158 100.325,50.325 ; U1.83 103.6,72.875 103.975,72.5 C13.2 ; U1.94 103.6,78.375 103.975,78 C14.2 ; U1.107 102.4,84.9 103.174,84.9 103.35,85.076 103.35,85.283 103.467,85.4 C1.2 ; C12.2 C12.2@103.025,87.5
  L1 [Signal] w0.5: BNC1.3 BNC1.3@63.5,60 ; BNC1.4 BNC1.4@63.5,70 ; v1(71,60) 71.113,60.113 72.485,60.113 U4.11 ; v1(72.649,75.55) C27.1 ; v1(73.5,72) X1.4 ; v1(75,78.5) 75.99,78.5 C25.2 ; v1(75,83) C24.2 ; X1.2 77.2,75.7 77.55,75.35 78.15,75.35 v1(78.5,75) ; v1(78.5,84) C10.2 ; v1(82.5,56.5) R6.1 ; C16.2 v1(83,91) ; v1(84,63) C6.2 ; v1(86,56) R3.1 ; R9.2 v1(86,91) ; v1(90,63.5) 90.1,63.6 C5.2 ; C17.2 v1(91.5,90) ; v1(94,64.5) C4.2 ; v1(95,55) 95.183,55.183 U5.5 ; C15.2 v1(95.5,90) ; v1(99.5,58.5) 99.5,56.619 100.29,55.829 101.302,55.829 U5.13 ; 100.325,50.325 v1(100.5,50.5) ; C2.2 100.95,63.55 v1(101,63.5) ; C3.2 v1(103.5,65.5) ; C12.2 v1(104,87.5) ; C21.2 v1(104,55) ; C13.2 v1(105,72.5) ; C14.2 v1(105,78) ; C1.2 104.9,85.4 v1(105,85.5) ; v1(106.5,67.5) 106.775,67.775 C22.2 ; J2.2 106.96,93.96 v1(107,94) ; v1(108,56) 108.445,55.555 109.31,55.555 U2.1 ; v1(109.5,65.5) 109.5,66.57 109.525,66.595 U3.4 ; C18.2 v1(114.5,64) ; v1(115,72.5) 115.55,71.95 C23.2 ; C20.2 v1(117.207,53.5) ; v1(117,67) R1.2 ; C19.2@117.5,52.11 C19.2 v1(118.5,52)
  other v1: 66,60 68.5,61 66,70
HSE_OSC_IN: C27.2 U1.23 X1.3 | length 10.7
  L1 [Signal] w0.2: 79.5,75 80.125,74.375 U1.23
  L1 [Signal] w0.3: 79,75.5 79.5,75
  L1 [Signal] w0.4: C27.2 74.4,76.45 74.8,76.05 X1.3 74.8,76.3 76,77.5 78.266,77.5 78.5,77.266 78.5,76 79,75.5
HSE_OSC_OUT: C28.2 U1.24 X1.1 | length 10.2
  L1 [Signal] w0.2: C28.2 76.117,68.5 76,68.617 76,70.5 77.2,71.7 X1.1 ; 79,74 79.5,74 79.625,73.875 U1.24
  L1 [Signal] w0.3: 78,73.5 78.5,74 79,74
  L1 [Signal] w0.4: X1.1 77.2,72.3 78,73.1 78,73.5
LED_ANODE: DS1.1 U1.42 | length 2.5
  L1 [Signal] w0.2: 85.5,65 U1.42
  L1 [Signal] w0.4: 85.5,65 86,64.5 DS1.1
LED_CATHODE: DS1.2 R3.2 | length 2.3
  L1 [Signal] w0.4: R3.2 DS1.2
LP2951_FB: R1.1 R2.1 U3.7 | length 21
  L1 [Signal] w0.4: R2.1 108,73 109,74 118.5,74 119,73.5 119,69.234 118.766,69 R1.1 116.975,69 116.84,69.135 U3.7
LSE_OSC_IN: C24.1 U1.8 X2.2 | length 5.3
  L1 [Signal] w0.2: C24.1 76.23,81.75 X2.2 79.65,81.75 79.775,81.875 U1.8
LSE_OSC_OUT: C25.1 U1.9 X2.1 | length 6.6
  L1 [Signal] w0.2: C25.1 77.74,79.51 X2.1 78.25,79.5 79.383,79.5 79.5,79.617 79.5,80.5 80,81 80,81.024 80.326,81.35 81.1,81.35 U1.9
MCU_VDD: C3.1 C4.1 C5.1 C6.1 C7.1 C8.1 C9.1 C10.1 C11.1 C12.1 C13.1 C14.1 C15.1 C16.1 C17.1 C18.1 J2.1 R8.1 R10.1 U1.6 U1.17 U1.30 U1.33 U1.39 U1.52 U1.62 U1.72 U1.84 U1.95 U1.108 U1.121 U1.131 U1.144 U2.2 U2.4 U5.3 U5.10 U5.11 U5.12 | length 53.2
  L1 [Signal] w0.2: C7.1 79.525,68.95 79.95,69.375 U1.33 ; R8.1 C8.1 80.088,70.95 80.15,70.888 81.112,70.888 U1.30 ; C9.1 79.526,77.024 80,77.024 80.326,77.35 81.1,77.35 U1.17 ; C10.1 80.075,83.1 80.275,82.9 81.1,82.9 U1.6 ; U1.144 C16.1 83.55,89.05 84,89.5 84.025,89.5 84.475,89.95 R10.1 ; C6.1 U1.39 ; U1.131 89.5,88.262 89.6,88.362 C11.1 89.55,89.05 89.55,89.95 C17.1 ; U1.52 90.525,65.975 90.525,65.201 90.701,65.025 90.883,65.025 91,64.908 C5.1 ; U1.121 94.5,88.262 94.6,88.362 C15.1 ; U1.62 95.5,64.925 95.9,64.525 C4.1 ; U1.72 101.625,66 102.1,65.525 C3.1 ; U1.84 102.387,73.387 103.988,73.387 C13.1 ; U1.95 102.387,78.887 103.988,78.887 C14.1 ; U1.108 102.875,85.375 102.95,85.45 102.95,85.925 103,85.975 C12.1 102.975,86.6 102.425,87.15 102.425,87.883 102.592,88.05 104.45,88.05 105,87.5 105,87.117 105.117,87 106.69,87 106.96,87.27 J2.1
  L1 [Signal] w0.3: U5.10 102.824,53.913 103,54.088 103,54.723 ; U5.11 102.824,54.548 103,54.723 ; U5.12 102.817,55.183 102.993,55.358 ; C3.1 102.088,65.488 102.088,64.775 102,64.687 102,64 102.993,63.007 ; 103,56.5 102.993,56.493 102.993,55.358 ; C18.1@111.5,63.9 C18.1 ; 102.993,55.358 103,55.351 103,54.723
  L1 [Signal] w0.5: 102.993,63.007 103,63 103,56.5
  L1 [Signal] w0.7: U2.4@111.5,62.095 111.75,61.845 U2.4
NRST: C26.1 J2.9 R8.2 U1.25 | length 49.9
  L1 [Signal] w0.2: v1(78,70.5) 78,69.55 C26.1 77.95,69.525 78.5,70.075 78.5,72.5 78.95,72.95 R8.2 ; R8.2@79.525,72.95 79.95,73.375 U1.25 ; v1(105,83) 106.5,83
  L1 [Signal] w0.4: 106.5,83 109,83 110.5,84.5 111,84.5 112.04,85.54 J2.9
  L4 [Signal] w0.2: v1(78,70.5) 78.5,70.5 79.5,71.5 83,71.5
  L4 [Signal] w0.4: 83,71.5 85.5,71.5 89,75 95,75 101.5,81.5 104.266,81.5 104.633,81.867 104.633,82.633 v1(105,83)
OPAMP_N: R6.2 R7.1 U4.2 | length 4.9
  L1 [Signal] w0.4: U4.2 78.07,57.554 79.446,57.554 79.5,57.5 80.32,57.5 R7.1 80.68,57.5 81.266,57.5 81.5,57.734 81.5,57.766 81.734,58 R6.2
OPAMP_P: R4.2 R5.2 U4.3 | length 10.9
  L1 [Signal] w0.4: U4.3 81.266,58.858 81.5,59.092 81.5,60.321 81.5,61.55 R5.2 80.05,63 80.766,63 81,63.234 81,63.766 81.188,63.954 81.996,63.954 R4.2
PDR_ON: R10.2 U1.143 | length 2.2
  L1 [Signal] w0.2: U1.143 83.525,87.275 83.525,88.1 84.475,89.05 R10.2
SWCLK: J2.5 U1.109 | length 11.8
  L1 [Signal] w0.2: U1.109 100.5,88.383 100.617,88.5 101.5,88.5 ; 105,89 105.92,89 106.08,89.16 108.83,89.16 109.5,88.49 J2.5
  L1 [Signal] w0.3: 101.5,88.5 103,88.5 103.5,89
  L1 [Signal] w0.4: 103.5,89 105,89
SWDIO: J2.3 U1.105 | length 8.7
  L1 [Signal] w0.2: U1.105 105.375,83.875 105.5,84
  L1 [Signal] w0.3: 105.5,84 106,84.5 107.5,84.5
  L1 [Signal] w0.4: 107.5,84.5 108,85
  L1 [Signal] w0.5: 108,85 108.23,85.23 J2.3
SWO: J2.7 U1.133 | length 28.9
  L1 [Signal] w0.2: U1.133 88.5,89.5 ; 106.457,89.71 106.607,89.56 110.44,89.56 110.77,89.23 J2.7
  L1 [Signal] w0.3: 88.5,89.5 88.5,91 89,91.5 90,91.5
  L1 [Signal] w0.5: 90,91.5 102.5,91.5 104,90 105.334,90 105.624,89.71 106.457,89.71
USART3_RX: U1.70 U5.1 | length 9.4
  L1 [Signal] w0.2: U5.1 96.687,61.187 99.5,64 U1.70
USART3_TX: U1.69 U5.4 | length 15.2
  L1 [Signal] w0.2: U5.4 95.182,55.818 94.5,56.5 94.5,62.883 94.617,63 96.5,63 97.5,64 98,64 99,65 U1.69
USB_D_N: J1.2 U5.8 | length 5.8
  L1 [Signal] w0.26: U5.8 97.848,53.278 98.309,52.816 98.309,48.851 J1.2
USB_D_P: J1.3 U5.9 | length 6.7
  L1 [Signal] w0.26: J1.3 99,52 99,53.125 99.152,53.278 U5.9
VBUS: C21.1 FB1.1 J1.1 | length 12.6
  L1 [Signal] w0.2: 97.5,51 v1(97.5,51.5) ; 104,52.5 C21.1 105.75,53.55 FB1.1
  L1 [Signal] w0.3: 97.5,51 97.7,50.8 J1.1
  L1 [Signal] w0.5: v1(100,51.5) 100.5,52 103,52 103.5,52.5 104,52.5
  L4 [Signal] w0.2: v1(97.5,51.5) v1(100,51.5)
VCAP_1: C2.1 U1.71 | length 1.5
  L1 [Signal] w0.2: U1.71 100.025,65.975 100.025,64.525 C2.1
VCAP_2: C1.1 U1.106 | length 1.7
  L1 [Signal] w0.2: U1.106 102.4,84.4 103.325,84.4 103.425,84.5 C1.1
pads on no net: J1.4 J1.6 J1.7 J1.8 J1.9 J1.10 J1.11 J2.4 J2.6 J2.8 J2.10 U1.1 U1.2 U1.3 U1.4 U1.5 U1.7 U1.10 U1.11 U1.12 U1.13 U1.14 U1.15 U1.18 U1.19 U1.20 U1.21 U1.22 U1.26 U1.27 U1.28 U1.29 U1.34 U1.35 U1.36 U1.41 U1.43 U1.44 U1.45 U1.46 U1.47 U1.48 U1.49 U1.50 U1.53 U1.54 U1.55 U1.56 U1.57 U1.58 U1.59 U1.60 U1.63 U1.64 U1.65 U1.66 U1.67 U1.68 U1.73 U1.74 U1.75 U1.76 U1.77 U1.78 U1.79 U1.80 U1.81 U1.82 U1.85 U1.86 U1.87 U1.88 U1.89 U1.90 U1.91 U1.92 U1.93 U1.96 U1.97 U1.98 U1.99 U1.100 U1.101 U1.102 U1.103 U1.104 U1.110 U1.111 U1.112 U1.113 U1.114 U1.115 U1.116 U1.117 U1.118 U1.119 U1.122 U1.123 U1.124 U1.125 U1.126 U1.127 U1.128 U1.129 U1.132 U1.134 U1.135 U1.136 U1.137 U1.139 U1.140 U1.141 U1.142 U3.2 U3.3 U3.5 U3.6 U4.5 U4.6 U4.7 U4.8 U4.9 U4.10 U4.12 U4.13 U4.14 U5.2 U5.6 U5.7 U5.14 U5.15 U5.16
copper on no net: | length 240
  L1 [Signal] w0.254: 55.5,44.5 55.5,48 55.5,97.5 122.5,97.5 122.5,44.5 55.5,44.5

## Polygon pours and split planes (outlines as drawn)
GND on L2 [GND] "GND_L02_P001" (solid, pour order 1): 56,94.948 cw(c58.54,94.948) 56.744,96.744 57,97 121,97 cw(c121,96) 122,96 122,45 56,45
GND on L3 [GND] "GND_L03_P003" (solid, pour order 3): 56,94.948 cw(c58.54,94.948) 56.744,96.744 57,97 121,97 cw(c121,96) 122,96 122,45 56,45
+3V6 on L1 [Signal] "+3V6_L01_P014" (solid, pour order 14): 107.6,71.4 107.625,71.375 110.05,71.375 110.575,70.85 110.575,69.825 109.2,69.825 108.75,69.375 108.75,68.5 107.2,68.5 107.175,68.525 107.225,68.575 107.225,71.225
+5V on L1 [Signal] "+5V_L01_P012" (solid, pour order 12): 113.475,53.55 108.35,53.55 107.925,53.975 107.9,53.95 106.7,53.95 106.7,52.95 106.75,53 113.55,53
+5V on L1 [Signal] "+5V_L01_P007" (solid, pour order 7): 113.5,55.925 113.525,55.9 115.075,55.9 115.075,54.2 115.2,54.075 115.975,54.075 115.975,52.975 116.2,52.75 116.2,50.975 113.65,50.975 113.45,51.175
MCU_VDD on L1 [Signal] "MCU_VDD_L01_P006" (solid, pour order 6): 112.25,64.925 112.35,64.825 112.35,62.65 113.95,62.65 114.075,62.525 114.075,56.8 114,56.8 112.9,55.7 112.9,54.275 111.125,54.275 110.725,54.675 110.725,58.575 109.525,59.775 109.825,60.075 109.825,62.6 110.675,62.6 110.925,62.85 110.825,62.85 110.825,64.875 110.775,64.925
GND on L1 [Signal] "GND_L01_P005" (solid, pour order 5): 61.125,71.875 66.375,71.875 66.475,71.775 66.3,71.6 66.3,63.6 69.65,63.6 69.85,63.4 69.85,58.025 69.825,58.05 61.175,58.05

## Silkscreen, mask and mechanical layers (free items; w line width, h text height)
Top Overlay:
  text "GND" at 107.2,94.575 h0.4 r90
  text "Prgming / Pins" at 113.325,87.375 h1
  text "SWDIO" at 108.425,83.825 h0.4 r90
  text "NRST" at 112.25,83.8 h0.4 r90
  text "SWCLK" at 109.675,83.775 h0.4 r90
  text "SWO" at 110.975,83.75 h0.4 r90
  text "+3V3" at 107.125,83.65 h0.4 r90